# Altium PCB PCB4.PcbDoc
Units mm, origin at the board's own origin, x right, y up, seen from the top; angles counter-clockwise.
Board outline 152.4 x 101.6 mm, 2 copper layers (Top Layer, Bottom Layer); 34 components, 25 nets, 96 pads, 8 vias.
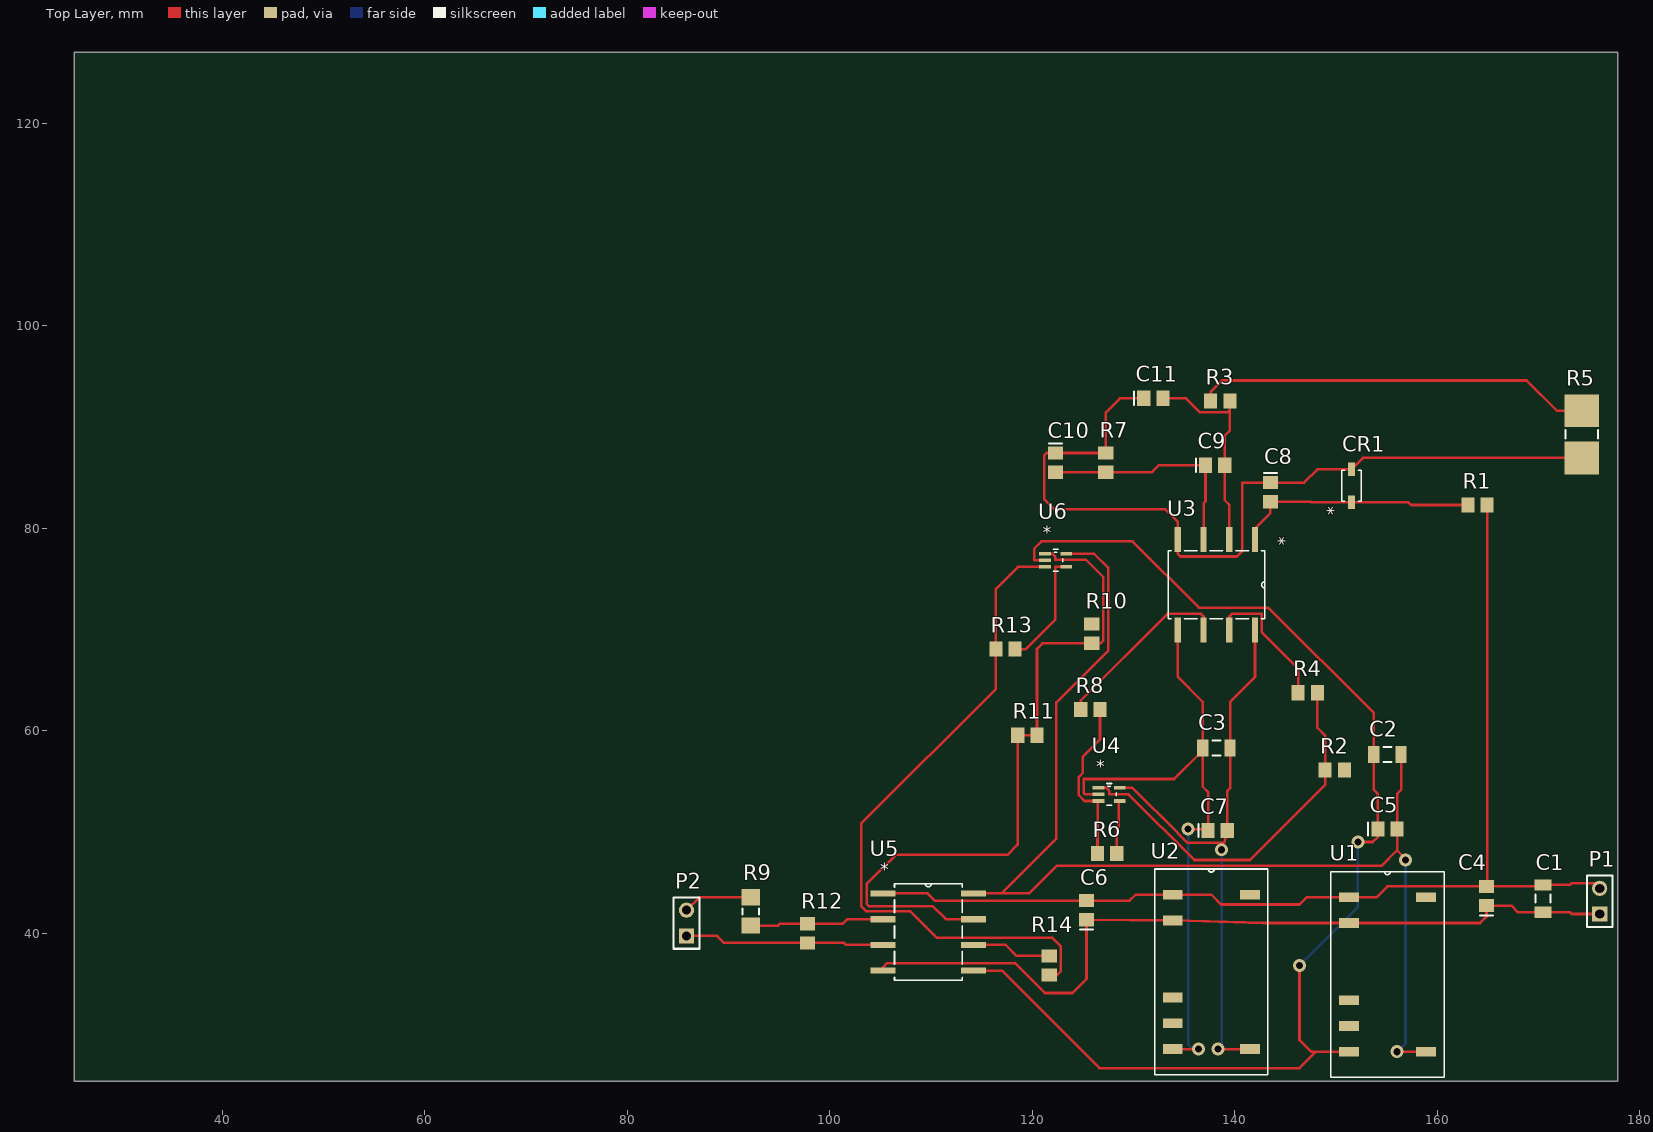
[diagram p0: Top Layer view]
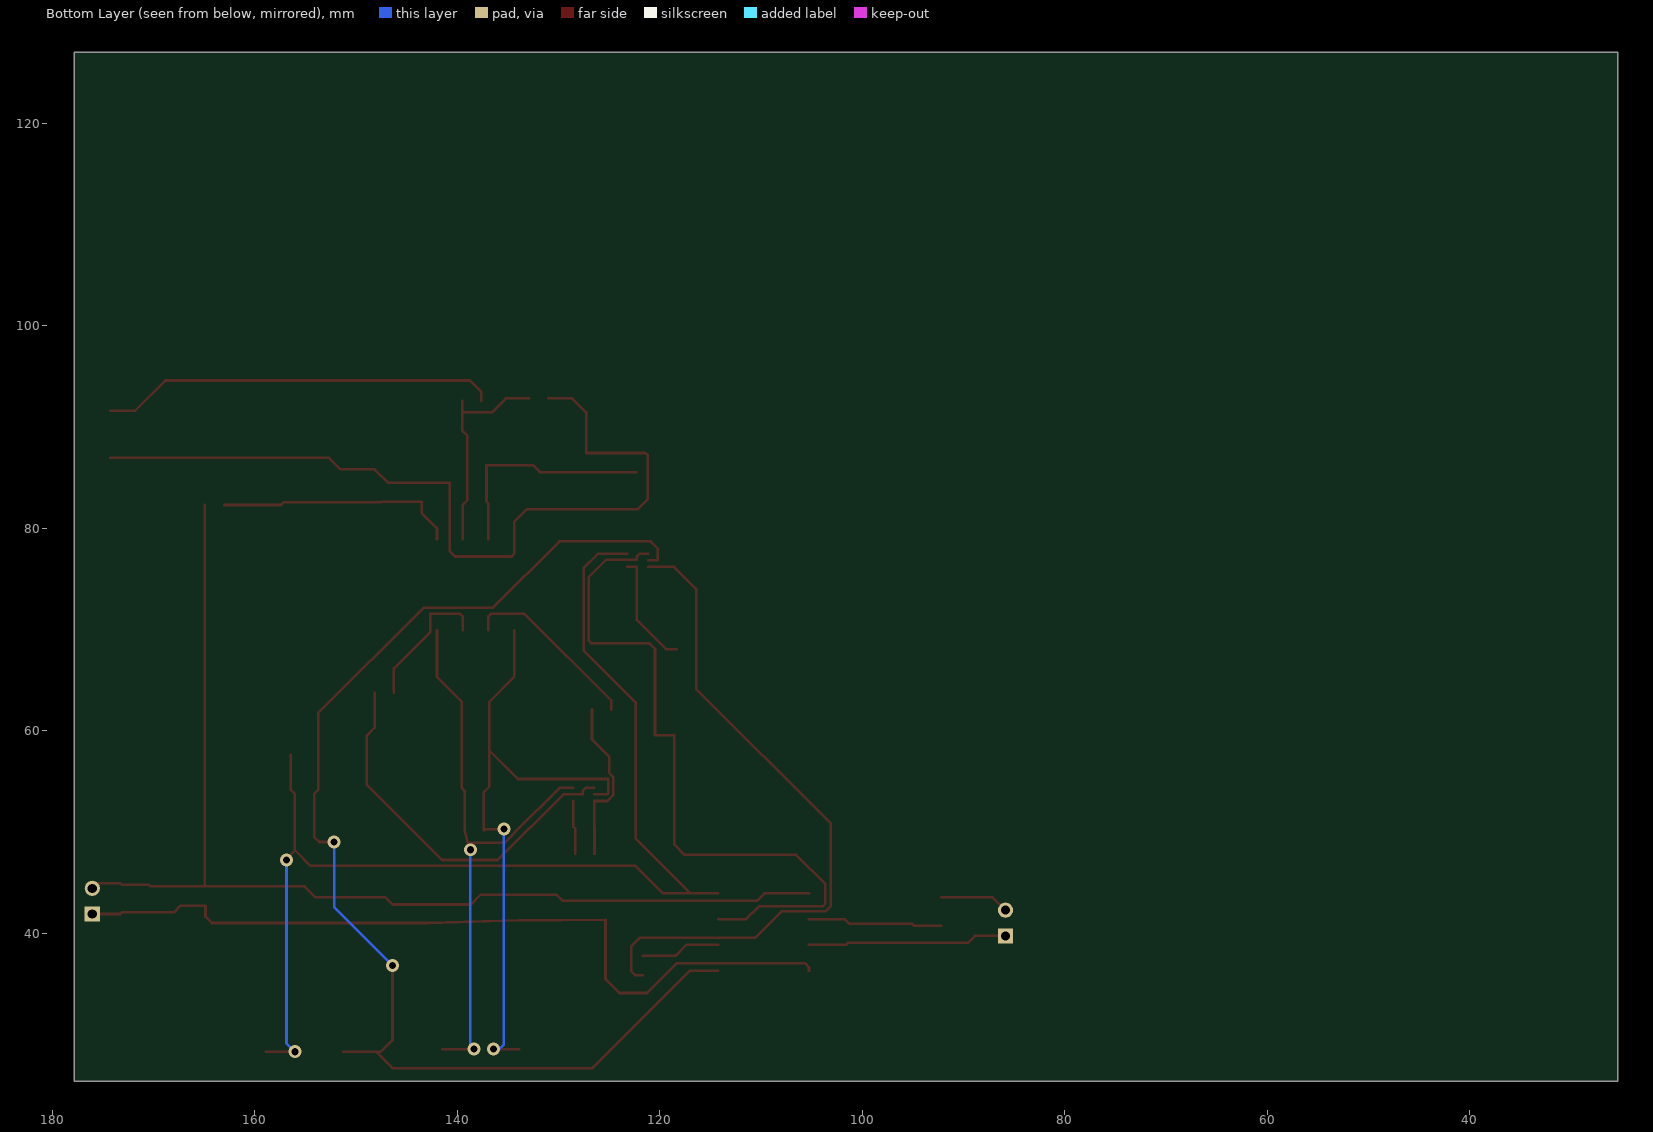
[diagram p1: Bottom Layer view, seen from below]

## Layer stack, top to bottom
Top Solder: solder mask 0.0102, Solder Resist, Dk 3.5
Top Layer: signal copper 0.0356
Dielectric 1: dielectric 0.32, FR-4, Dk 4.8
Bottom Layer: signal copper 0.0356
Bottom Solder: solder mask 0.0102, Solder Resist, Dk 3.5

## Board outline
25.4,25.4 177.8,25.4 177.8,127 25.4,127

## Design rules (kind name [scope] priority, off if disabled: settings)
Clearance [All] p1: gap=0.254
PolygonConnect [All] p1: connectstyle=Relief reliefconductorwidth=0.254 reliefentries=4 polygonreliefangle="90 Angle" airgapwidth=0.254
RoutingVias [All] p1: holewidth=0.711 width=1.27 viastyle="Through Hole" minholewidth=0.711 minwidth=1.27 maxholewidth=0.711 maxwidth=1.27
SilkToSolderMaskClearance [All] p1: minsilkscreentomaskgap=0.254 clearancetoexposedcopper=TRUE
SolderMaskExpansion [All] p1: expansion=0.102
Width [All] p1: maxlimit=0.254 minlimit=0.254 preferedwidth=0.254
29 further rules are at their usual default settings.

## Classes and differential pairs
component class Sheet1: C1 C2 C3 C4 C5 C6 C7 P1 U2
component class Sheet2: C8 C9 C10 C11 CR1 R1 R2 R3 R4 R5 R6 R7 R8 U3
component class Sheet3: P2 R9 R10 R11 R12 R13 R14 U5 U6

## Components (designator, comment, footprint, x,y, rotation, side; value= is the part's Value field where it differs from the comment)
C1 "Cap Semi" C1206 170.434,43.434 r90 top
C2 "Cap Semi" C1206 155.067,57.658 r0 top
C3 "Cap Semi" C1206 138.176,58.293 r0 top
C4 "C0805" 0805 164.846,43.688 r90 top
C5 "C0805" 0805 155.067,50.292 r0 top
C6 "C0805" 0805 125.349,42.291 r90 top
C7 "C0805" 0805 138.303,50.165 r0 top
C8 "C0805" 0805 143.51,83.566 r270 top
C9 "C0805" 0805 138.049,86.233 r0 top
C10 "C0805" 0805 122.301,86.487 r270 top
C11 "C0805" 0805 131.953,92.837 r0 top
CR1 "BZT52C6V8-V-GS08" SOD123 151.511,84.201 r90 top
P1 "Header 2" HDR1X2 176.022,41.91 r90 top
P2 "Header 2" HDR1X2 85.852,39.751 r90 top
R1 "ERJ6EN" 6-0805 163.957,82.296 r0 top
R2 "ERJ6EN" 6-0805 149.86,56.134 r0 top
R3 "ERJ6EN" 6-0805 138.557,92.583 r0 top
R4 "ERJ6EN" 6-0805 147.193,63.754 r0 top
R5 "ERJM1WT" M1WT-2512 174.244,89.281 r90 top
R6 "ERJ6EN" 6-0805 127.381,47.879 r0 top
R7 "ERJ6EN" 6-0805 127.254,86.487 r270 top
R8 "ERJ6EN" 6-0805 125.73,62.103 r0 top
R9 "ERJ8EN" 8-1206 92.202,42.164 r90 top
R10 "ERJ6EN" 6-0805 125.857,69.596 r90 top
R11 "ERJ6EN" 6-0805 119.507,59.563 r0 top
R12 "ERJ6EN" 6-0805 97.79,40.005 r90 top
R13 "ERJ6EN" 6-0805 117.348,68.072 r0 top
R14 "ERJ6EN" 6-0805 121.666,36.83 r90 top
U1 "DCP010505B_DUA_7" DUA7 155.067,35.941 r0 top
U2 "DCP010505B_DUA_7" DUA7 137.668,36.195 r0 top
U3 "AMC1200_DUB_8" DUB8 138.176,74.422 r270 top
U4 "OPA376_DCK_5" DCK5 127.584,53.721 r0 top
U5 "AMC1100_DUB_8" DUB8 109.728,40.132 r0 top
U6 "OPA376_DCK_5" DCK5 122.301,76.835 r0 top

## Footprints (in the part's own frame and the unit in brackets; to place one, negate y for a bottom-side part, rotate by r counter-clockwise, add the part's x,y. Pads: shape width x height; smd on the part's side, far side on the other; paste and mask are expansions set on the pad)
6-0805 [mm] "Chip Resistor; Body 2 x 1.2 mm (LxW typ)"
  rect 1.3x1.5 smd: 1(-0.95,0) 2(0.95,0)
8-1206 [mm] "Chip Resistor; Body 3.1 x 1.6 mm (LxW typ)"
  rect 1.6x1.8 smd: 1(-1.4,0) 2(1.4,0)
  silkscreen extent -0.3,-0.8 0.3,0.8
0805 [mm] "Chip Capacitor; Body 2.0 x 1.2 mm (LxW typ)"
  rect 1.3x1.5 smd: 1(-0.95,0) 2(0.95,0)
  silkscreen extent -1.9,-0.65 -1.9,0.65
C1206 [mm] "Chip Capacitor, Body 3.2x1.6mm, IPC High Density"
  rect 1.1x1.7 smd: 1(-1.35,0) 2(1.35,0)
  silkscreen extent -0.4,-0.75 0.4,0.75, body extent -1.7,-0.9 1.7,0.9, height 1.3
DCK5 [mil]
  rect 46x14 smd: 1(-41,25.59) 2(-41,0) 3(-41,-25.59) 4(41,-25.59) 5(41,25.59)
  silkscreen extent -9,-42 28,42
DUA7 [mil]
  rect 77x38 smd: 1(-150,300) 2(-150,200) 3(-150,-100) 4(-150,-200) 5(-150,-300) 6(150,-300) 7(150,300)
  silkscreen extent -220,-400 220,400
DUB8 [mil]
  rect 96.5x24 smd: 1(-176.25,150) 2(-176.25,50) 3(-176.25,-50) 4(-176.25,-150) 5(176.25,-150) 6(176.25,-50) 7(176.25,50) 8(176.25,150)
  silkscreen extent -132,-188 132,188
HDR1X2 [mm] "Connector; Header; 2 Position"
  rect 1.5x1.5 hole 0.9: 1(0,0)
  round 1.5 hole 0.9: 2(2.54,0)
  silkscreen extent -1.27,-1.27 3.81,1.27
M1WT-2512 [mm] "Chip Resistor; Body 6.4 x 3.2 mm (LxW typ)"
  rect 3.25x3.4 smd: 1(-2.325,0) 2(2.325,0)
  silkscreen extent -0.4,-1.6 0.4,1.6
SOD123 [mil]
  rect 53x28 smd paste+0 mask+0: 1(-63.5,0) 2(63.5,0)
  silkscreen extent -61,-39 61,39, body extent 0,0 10,10, height 10

## Part data
C1 C2 C3: "Capacitor (Semiconductor SIM Model)"
C4 C5 C6 C7 C8 C9 C10 C11: "Ceramic Chip Capacitor - Standard"
CR1 U1 U2 U3 U4 U5 U6: "Imported"
P1 P2: "Header, 2-Pin"
R1 R2 R3 R4 R6 R7 R8 R10 R11 R12 R13 R14: "Precision Thick Film Chip Resistor, 10 Ohm to 2.2M Ohm Range, 1% Tolerance, 0805 Size, 0.1 W"
R5: "Low Resistance Value Chip Resistor, 2m Ohm to 4m Ohm Range, 1% and 5% Tolerance, 2512 Size, 1 W"
R9: "Precision Thick Film Chip Resistor, 10 Ohm to 2.2M Ohm Range, 1% Tolerance, 1206 Size, 0.125 W"

## Via types
v1: diameter 1.27, hole 0.711, Top Layer to Bottom Layer, 8 vias

## Nets (pads, with @x,y where several pads share a name; then routed paths per layer and width w, separated by ;. In a path a pad name is that pad's centre, name@x,y a point inside that pad or via, vN(x,y) a via of type N, cw(c..) or ccw(c..) an arc to the next point about the centre after c; other vN are vias at no path point)
GND_1: C1.1 C4.1 C6.1 P1.1 U1.2 U2.2 U5.4 | length 80.6
  Top Layer w0.254: U5.4 105.251,36.646 105.664,37.059 118.288,37.059 121.234,34.112 123.952,34.112 125.349,35.509 C6.1 129.682,41.275 U2.2 142.824,41.021 U1.2 164.211,41.021 164.846,41.656 C4.1 167.31,42.738 167.964,42.084 C1.1 173.101,42.084 173.275,41.91 175.641,41.91 P1.1@175.895,42.164
GND_ISO1: C2.1 C5.1 U1.5 U5.5 U6.2 | length 123.3
  Top Layer w0.254: U5.5 116.992,36.322 126.619,26.695 146.38,26.695 148.006,28.321 ; U6.2@121.133,76.835 120.167,76.835 120.167,77.978 120.904,78.715 129.896,78.715 136.441,72.169 143.289,72.169 153.721,61.738 153.721,57.658 C2.1 153.717,54.172 154.117,53.772 C5.1 154.117,49.53 153.609,49.022 v1(152.146,49.022) ; v1(146.38,36.83) 146.38,29.464 147.523,28.321 148.006,28.321 ; U1.5 148.006,28.321
  Bottom Layer w0.254: v1(146.38,36.83) 152.146,42.596 v1(152.146,49.022)
GND_ISO2: C3.1 C7.1 U2.5 U3.5 U4.2 | length 63.8
  Top Layer w0.254: U4.2@126.467,53.721 125.222,53.721 125.095,53.848 125.095,55.245 134.007,55.245 C3.1@136.826,58.064 ; U2.5 v1(136.398,28.575) ; U3.5 134.366,65.325 136.826,62.865 C3.1 C3.1@136.826,58.064 ; v1(135.382,50.292) 137.226,50.292 C7.1 137.353,53.95 136.826,54.477 C3.1@136.826,58.064
  Bottom Layer w0.254: v1(135.382,50.292) 135.382,29.032 135.839,28.575 v1(136.398,28.575)
NetC8_1: C8.1 C10.1 C11.1 CR1.2 R5.1 R7.1 U3.4 | length 84.1
  Top Layer w0.254: C11.1 128.651,92.837 127.254,91.44 R7.1 C10.1 121.412,87.437 121.158,87.183 121.158,82.88 122.149,81.89 133.096,81.89 134.366,80.62 U3.4 134.366,77.47 134.62,77.216 140.208,77.216 140.716,77.724 140.716,84.465 140.767,84.516 C8.1 146.837,84.516 148.135,85.814 CR1.2 152.653,86.956 R5.1
NetC8_2: C8.2 CR1.1 R1.1 U3.1 | length 24
  Top Layer w0.254: U3.1 141.986,79.985 143.51,81.509 C8.2 147.472,82.616 147.5,82.588 CR1.1 157.099,82.588 157.391,82.296 R1.1
NetC9_1: C9.1 C10.2 R7.2 U3.3 | length 22.5
  Top Layer w0.254: C10.2 R7.2 131.826,85.537 132.522,86.233 C9.1 137.099,82.641 136.906,82.448 U3.3
NetC9_2: C9.2 C11.2 R3.2 U3.2 | length 21.4
  Top Layer w0.254: C11.2 135.179,92.837 136.576,91.44 139.253,91.44 139.507,91.694 ; U3.2 139.446,82.321 138.999,82.768 C9.2 138.999,89.154 139.507,89.662 139.507,91.694 ; R3.2 139.507,91.694
NetP2_1: P2.1 R12.1 U5.3 | length 19.8
  Top Layer w0.254: P2.1 88.875,39.751 89.571,39.055 R12.1 101.422,39.055 101.615,38.862 U5.3
NetP2_2: P2.2 R9.2 | length 6.9
  Top Layer w0.254: P2.2 87.125,43.564 R9.2
NetR2_1: R2.1 R4.2 U4.1 | length 38.1
  Top Layer w0.254: U4.1@126.467,54.371 127.315,54.371 127.584,54.102 127.584,53.721 129.515,53.721 135.992,47.244 141.493,47.244 148.91,54.661 R2.1 148.91,59.538 148.143,60.305 R4.2
NetR3_1: R3.1 R5.2 | length 39.2
  Top Layer w0.254: R3.1 137.607,93.472 138.725,94.59 168.808,94.59 171.792,91.606 R5.2
NetR4_1: R4.1 U3.7 | length 14
  Top Layer w0.254: U3.7 139.446,71.298 139.7,71.552 142.672,71.552 142.672,69.723 146.243,66.152 R4.1
NetR6_1: R6.1 R8.2 U4.3 | length 16.7
  Top Layer w0.254: R6.1 126.431,50.444 126.467,50.48 126.467,53.071 125.154,53.071 124.587,53.638 124.587,55.455 124.993,55.862 124.993,57.455 126.68,59.141 R8.2
NetR6_2: R6.2 U4.4 | length 5.3
  Top Layer w0.254: R6.2 128.331,50.343 128.549,50.561 U4.4@128.549,53.071
NetR8_1: R8.1 U3.6 | length 18
  Top Layer w0.254: R8.1 124.78,62.992 133.34,71.552 136.652,71.552 136.906,71.298 U3.6
NetR9_1: R9.1 R12.2 U5.2 | length 13.3
  Top Layer w0.254: R9.1 94.894,40.764 95.085,40.955 R12.2 101.295,40.955 101.742,41.402 U5.2
NetR10_1: R10.1 R11.1 R11.2 U5.7 U6.1 | length 71.1
  Top Layer w0.254: U5.7 111.455,41.402 110.185,42.672 103.886,42.672 103.632,42.926 103.632,44.856 106.528,47.752 117.541,47.752 118.557,48.768 R11.1 R11.2 120.457,68.097 121.006,68.646 R10.1 126.746,68.646 127,68.9 127,75.184 125.273,76.911 122.25,76.911 122.25,77.216 121.981,77.485 U6.1@121.133,77.485
NetR13_1: R13.1 R14.1 U6.3 | length 67.5
  Top Layer w0.254: U6.3@121.133,76.185 118.567,76.185 116.398,74.016 R13.1 116.398,64.15 103.124,50.876 103.124,42.672 103.632,42.164 107.95,42.164 110.541,39.573 121.92,39.573 122.809,38.684 122.809,36.261 122.428,35.88 R14.1
NetR13_2: R13.2 U6.4 | length 11.3
  Top Layer w0.254: R13.2 119.355,68.072 122.276,70.993 122.276,76.185 U6.4@123.215,76.185
NetR14_2: R14.2 U5.6 | length 7.9
  Top Layer w0.254: U5.6 117.373,38.862 118.455,37.78 R14.2
VCC1: R2.2
VCC2: R10.2
VDD_1: C1.2 C4.2 C6.2 P1.2 R1.2 U1.1 U2.1 U5.1 | length 110.2
  Top Layer w0.254: U5.1 109.652,43.942 110.353,43.241 C6.2 129.616,43.241 130.19,43.815 U2.1 137.668,43.815 138.633,42.85 146.38,42.85 147.091,43.561 U1.1 153.99,43.561 155.067,44.638 C4.2 ; R1.2 164.907,44.699 C4.2 ; P1.2@175.895,44.704 175.641,44.958 173.275,44.958 173.101,44.784 C1.2 170.288,44.638 C4.2
VDD_ISO1: C2.2 C5.2 U1.6 U5.8 U6.5 | length 118
  Top Layer w0.254: U5.8 116.967,43.942 ; U6.5@123.215,77.485 126.111,77.485 127.508,76.088 127.508,67.945 122.377,62.814 122.377,49.352 116.967,43.942 ; v1(156.017,28.321) U1.6 ; C2.2 156.417,54.172 156.017,53.772 C5.2 156.017,48.209 ; v1(156.845,47.249) 156.845,47.381 156.017,48.209 ; 116.967,43.942 119.685,43.942 122.403,46.66 154.468,46.66 156.017,48.209
  Bottom Layer w0.254: v1(156.017,28.321) 156.845,29.149 v1(156.845,47.249)
VDD_ISO2: C3.2 C7.2 U2.6 U3.8 U4.5 | length 58.6
  Top Layer w0.254: U4.5@128.549,54.371 129.884,54.371 134.366,49.889 134.366,49.871 135.307,48.931 138.938,48.931 ; v1(138.328,28.575) U2.6 ; v1(138.684,48.26) 138.684,48.677 138.938,48.931 ; U3.8 141.986,65.325 139.526,62.865 C3.2 139.526,54.35 139.253,54.077 C7.2 138.938,48.931
  Bottom Layer w0.254: v1(138.328,28.575) 138.684,28.931 v1(138.684,48.26)
pads on no net: U1.3 U1.4 U1.7 U2.3 U2.4 U2.7

## Text inside footprints (layer, text, board x,y; h text height)
CR1: Top Overlay "*" at 150.368,81.28 h1.27 r90
U3: Top Overlay "*" at 143.739,79.153 h1.27 r270; Mechanical 13 "*" at 143.739,79.153 h1.27 r270
U4: Top Overlay "*" at 126.289,55.87 h1.27; Mechanical 13 "*" at 126.289,55.87 h1.27
U5: Top Overlay "*" at 104.997,45.695 h1.27; Mechanical 13 "*" at 104.997,45.695 h1.27
U6: Top Overlay "*" at 121.006,78.984 h1.27; Mechanical 13 "*" at 121.006,78.984 h1.27